# EAGLE board MovuinoHealthBandV0.2.7.4-carrierUSB-v0.2 (EAGLE 9.6.2)
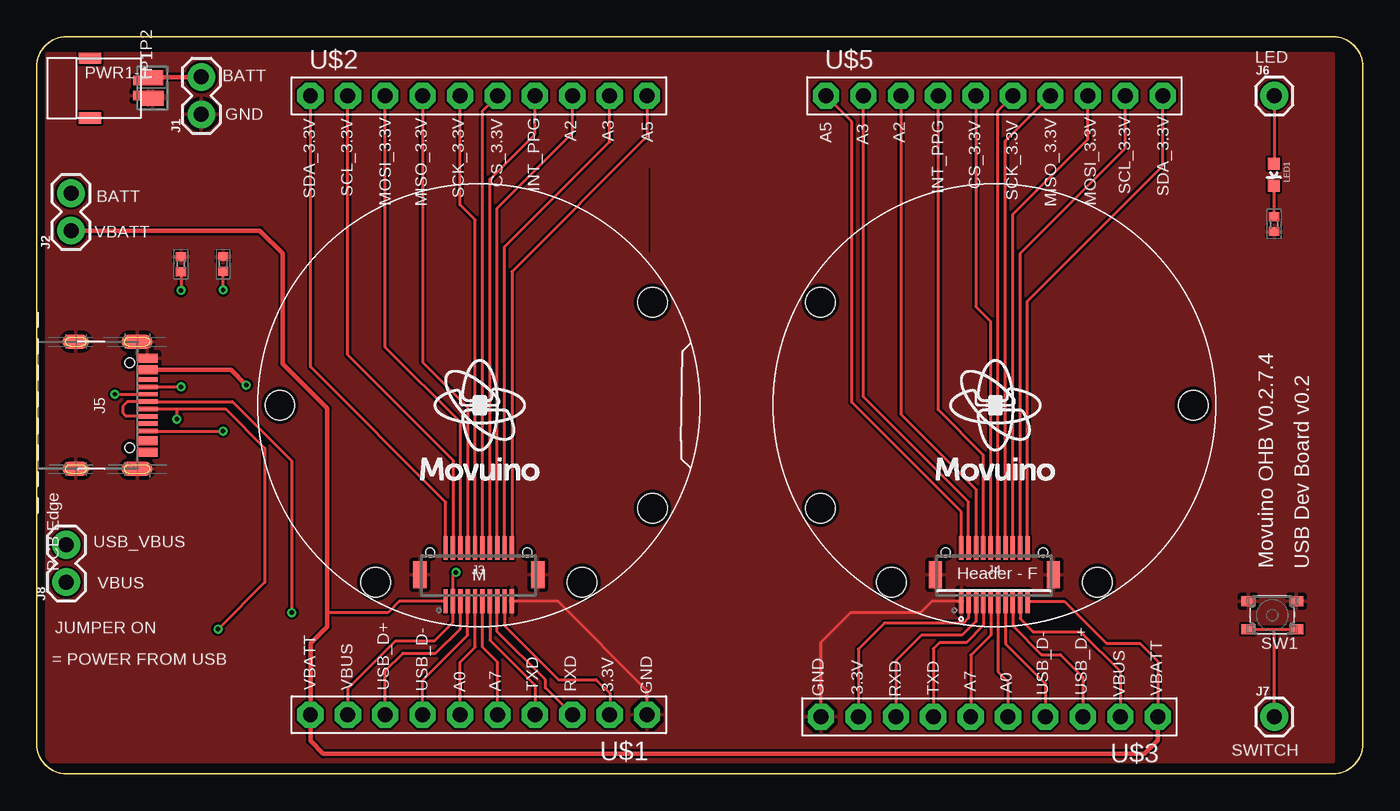
[diagram p0: board, top side]
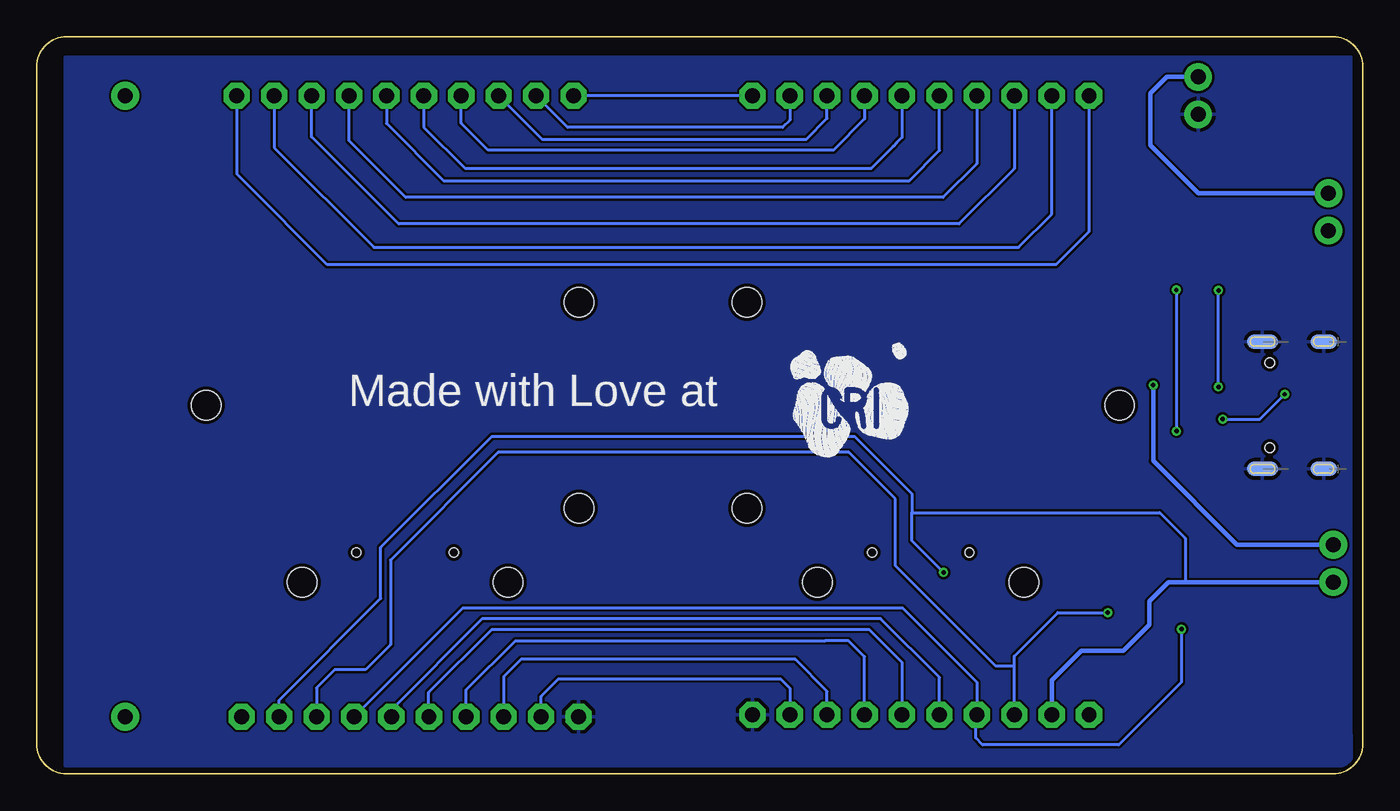
[diagram p1: board, bottom side, seen from below]

Size 90 x 50 mm. Coordinates in mm from the lower left corner, seen from the top.
Outline: 90,2 90,48 arc90 88,50 2,50 arc90 0,48 0,2 arc90 2,0 88,0 arc90 90,2
Copper layers (1*16): Top 0.035mm / dielectric 1.5mm / Bottom 0.035mm
Design rules "PCBWAY_2layer_DRU_no_angle_cheap": minimum track width 6mil, minimum drill 0.3mm, track to track 6mil, track to pad 6mil, pad to pad 6mil, via to via 6mil, smd to smd 0mil, copper to edge 10mil, drill to drill 10mil, minimum pad ring 10mil, minimum via ring 6mil, stop-mask expansion 2mil, vias tented up to drill 100mil, thermal gap 10mil
Net classes: 1 pcbway_smallest: width 0.102 mm, drill 0.2 mm, clearance 0.102 mm; 2 pcbway_cheap: width 0.152 mm, drill 0.3 mm, clearance 0.152 mm; 3 pcbway_5mil: width 0.127 mm, drill 0.25 mm, clearance 0.127 mm; 4 pcbway_4mil: width 0.102 mm, drill 0.2 mm, clearance 0.102 mm; 5 EC-Class7-drill0.15: width 0.125 mm, drill 0.15 mm, clearance 0.125 mm; 6 JLCPCB: width 0.127 mm, drill 0.2 mm, clearance 0.127 mm; 7 JLCPCB_0.3/0.6: width 0.127 mm, drill 0.3 mm, clearance 0.127 mm
Holes 2 mm at 16.5,25 41.8,32 41.8,18 23,13 37,13 58,13 72,13 53.2,18 53.2,32 78.5,25
tRestrict: area 41.6,35.4 to 41.6,41.1

## Footprints (pad centres in the part's own frame; a part is rotated, then mirrored left to right if it is on the bottom)
1X02 = drill 1.016 pad 1.88: 1 0,0; 2 2.54,0
DF12-20-DS = smd 0.3 x 1.6: 1 -2.25,-1.8; 2 -2.25,1.8; 3 -1.75,-1.8; 4 -1.75,1.8; 5 -1.25,-1.8; 6 -1.25,1.8; 7 -0.75,-1.8; 8 -0.75,1.8; 9 -0.25,-1.8; 10 -0.25,1.8; 11 0.25,-1.8; 12 0.25,1.8; 13 0.75,-1.8; 14 0.75,1.8; 15 1.25,-1.8; 16 1.25,1.8; 17 1.75,-1.8; 18 1.75,1.8; 19 2.25,-1.8; 20 2.25,1.8 | smd 0.9 x 1.8: F1 -4,0; F2 4,0 | hole 0.6: -3.3,1.5; 3.3,1.5
DF12(5.0)-20-DP = smd 0.3 x 1.6: 1 -2.25,-1.8; 2 -2.25,1.8; 3 -1.75,-1.8; 4 -1.75,1.8; 5 -1.25,-1.8; 6 -1.25,1.8; 7 -0.75,-1.8; 8 -0.75,1.8; 9 -0.25,-1.8; 10 -0.25,1.8; 11 0.25,-1.8; 12 0.25,1.8; 13 0.75,-1.8; 14 0.75,1.8; 15 1.25,-1.8; 16 1.25,1.8; 17 1.75,-1.8; 18 1.75,1.8; 19 2.25,-1.8; 20 2.25,1.8 | smd 0.9 x 1.8: F1 -4,0; F2 4,0 | hole 0.6: -3.3,1.5; 3.3,1.5
USB-C-16P = smd 0.6 x 1.4: A1B12 -3.2,0.7; A4B9 -2.4,0.7; B1A12 3.2,0.7; B4A9 2.4,0.7 | smd 0.3 x 1.4: A5 -1.25,0.7; A6 -0.25,0.7; A7 0.25,0.7; A8 -1.75,0.7; B5 1.75,0.7; B6 0.75,0.7; B7 -0.75,0.7; B8 1.25,0.7 | smd 1 x 2.1: SHLD1 -4.32,0; SHLD2 4.32,0 | smd 1 x 2.1 bottom: SHLD3 -4.32,0; SHLD4 4.32,0 | smd 1 x 1.8: SHLD5 -4.32,-4.15; SHLD8 4.32,-4.15 | smd 1 x 1.8 bottom: SHLD6 -4.32,-4.15; SHLD7 4.32,-4.15 | hole 0.65: -2.89,-0.5; 2.89,-0.5
1X01 = drill 1.016 pad 1.88: 1 0,0
LED-0603 = smd 0.8 x 0.8: A 0,-0.75; C 0,0.75
PWR2P_1.0 = smd 2.032 x 0.635: + 0.508,0.508; - 0.508,-0.508 | smd 1.524 x 0.762: P$3 -3.429,2.032; P$4 -3.429,-2.032
R0402-SMALL-TDOCU = smd 0.6 x 0.7: 1 -0.5,0; 2 0.5,0
BTN_KMT0 = smd 0.95 x 0.7: A -1.625,0.95; A' 1.625,0.95; B -1.625,-0.95; B' 1.625,-0.95
PAD-1X1.5_NOSILK = smd 1 x 1.5: P$1 0,0
1X10-BIG = drill 1.016 pad 1.778 octagon: 1 -11.43,0; 2 -8.89,0; 3 -6.35,0; 4 -3.81,0; 5 -1.27,0; 6 1.27,0; 7 3.81,0; 8 6.35,0; 9 8.89,0; 10 11.43,0

## Placement (x,y rotation side)
J1  [1X02]  11.17,44.74 90 top
J2  [1X02]  2.32,36.85 90 top
J3  DF12-20-MFRECEPTACLE-MF  [DF12-20-DS]  30,13.5 0 top
J4  DF12-20-MFHEADER-5MM-LEGS-BOSS  [DF12(5.0)-20-DP]  65,13.5 0 top
J5  [USB-C-16P]  6.8,25 270 top
J6  [1X01]  84,46 0 top
J7  [1X01]  84,3.86 0 top
J8  [1X02]  2,13 90 top
LED1  [LED-0603]  83.97,40.64 180 top
PWR1-1  PWR2P_1.0  [PWR2P_1.0]  7.04,46.52 0 top
R2_1  120  [R0402-SMALL-TDOCU]  83.99,37.29 90 top
R2_3  5.1K  [R0402-SMALL-TDOCU]  12.65,34.59 270 top
R2_4  5.1K  [R0402-SMALL-TDOCU]  9.79,34.57 270 top
SW1  [BTN_KMT0]  83.86,10.75 180 top
TP1  [PAD-1X1.5_NOSILK]  7.86,45.81 90 top
TP2  [PAD-1X1.5_NOSILK]  7.84,47.25 90 top
U$1  PINHD-1X10  [1X10-BIG]  30,4 180 top
U$2  PINHD-1X10  [1X10-BIG]  30,46 0 top
U$3  PINHD-1X10  [1X10-BIG]  64.66,3.86 180 top
U$5  PINHD-1X10  [1X10-BIG]  65,46 0 top
U$7  LOGO_MOVUINOTOP  [LOGO_MOVUINO_BMP_10MM]  30,25 0 top
U$8  LOGO_MOVUINOTOP  [LOGO_MOVUINO_BMP_10MM]  65,25 0 top
U$9  LOGO-CRI-NEW-110MM-BOTTOM-SILK  [LOGO_CRI-NEW-BMP10MM-BOTTOM]  34.65,25 0 top

## Library data of the parts
J1 J2 J6-J8 = SparkFun-Connectors
J3 = movuino; DESCRIPTION: Receptacle metal fitting and Boss 3.5 mm - 5mm; MPN: DF12-20DS-0.5V(86)
J4 = movuino; MPN: DF12(5.0)-20DP-0.5V(86)
J5 SW1 TP1 TP2 = movuino
LED1 = movuino; COLOUR: Red; FORWARD_INTENSITY: 25ma; FORWARD_VOLTAGE: 2.5V; LUMINOUS_INTENSITY: 180mcd; MF: OSRAM Opto Semiconductors; MPN: LS Q976-NR-1; OC_MOUSER: 720-LSQ976-NR-1; OC_RS: 6545420
PWR1-1 = movuino; MF: JST; MPN: SM02B-SRSS-TB(LFSN); OC_RS: 5151490
R2_1 R2_3 R2_4 = movuinoV0
U$1-U$3 U$5 = adafruit
U$7-U$9 = movuino_aestheticsV0

## Nets
3.3V [pcbway_cheap]: J3.17 J4.3 U$1.2 U$3.9
A0 [pcbway_cheap]: J3.9 J4.11 U$1.6 U$3.5
A2 [pcbway_cheap]: J3.16 J4.6 U$2.8 U$5.3
A3 [pcbway_cheap]: J3.18 J4.4 U$2.9 U$5.2
A5 [pcbway_cheap]: J3.20 J4.2 U$2.10 U$5.1
A7 [pcbway_cheap]: J3.11 J4.9 U$1.5 U$3.6
BATT [pcbway_cheap]: J1.2 J2.2 PWR1-1.+ TP2.P$1
CS_3.3V [pcbway_cheap]: J3.12 J4.10 U$2.6 U$5.5
GND [pcbway_cheap]: J1.1 J3.19 J3.F1 J3.F2 J4.1 J4.F1 J4.F2 J5.A1B12 J5.SHLD1 J5.SHLD2 J5.SHLD3 J5.SHLD4 J5.SHLD5 J5.SHLD6 J5.SHLD7 J5.SHLD8 PWR1-1.- R2_1.1 R2_3.1 R2_4.1 SW1.B SW1.B' TP1.P$1 U$1.1 U$3.10
INT_PPG [pcbway_cheap]: J3.14 J4.8 U$2.7 U$5.4
MISO_3.3V [pcbway_cheap]: J3.8 J4.14 U$2.4 U$5.7
MOSI_3.3V [pcbway_cheap]: J3.6 J4.16 U$2.3 U$5.8
N$2 [pcbway_cheap]: LED1.C R2_1.2
N$4 [pcbway_cheap]: J6.1 LED1.A
N$6 [pcbway_cheap]: J7.1 SW1.A SW1.A'
N$19 [pcbway_cheap]: J5.A5 R2_4.2
N$20 [pcbway_cheap]: J5.B5 R2_3.2
RXD [pcbway_cheap]: J3.15 J4.5 U$1.3 U$3.8
SCK_3.3V [pcbway_cheap]: J3.10 J4.12 U$2.5 U$5.6
SCL_3.3V [pcbway_cheap]: J3.4 J4.18 U$2.2 U$5.9
SDA_3.3V [pcbway_cheap]: J3.2 J4.20 U$2.1 U$5.10
TXD [pcbway_cheap]: J3.13 J4.7 U$1.4 U$3.7
USB_D+ [pcbway_cheap]: J3.5 J4.15 J5.A6 J5.B6 U$1.8 U$3.3
USB_D- [pcbway_cheap]: J3.7 J4.13 J5.A7 J5.B7 U$1.7 U$3.4
USB_VBUS [pcbway_cheap]: J5.A4B9 J8.2
VBATT [pcbway_cheap]: J2.1 J3.1 J4.19 U$1.10 U$3.1
VBUS [pcbway_cheap]: J3.3 J4.17 J8.1 U$1.9 U$3.2

## Tracks (layer width: path | path; a pad name or v marks a point on that pad's centre or on a via)
3.3V
  Top 0.2: J3.17 31.75,10.04 35.41,6.38 37.97,6.38 38.9,5.45 U$1.2 | J4.3 63.25,10.57 62.9,10.22 57.53,10.22 55.77,8.46 U$3.9
  Bottom 0.2: U$3.9 55.77,5.25 54.59,6.43 39.51,6.43 38.89,5.81 U$1.2
A0
  Top 0.2: U$1.6 28.73,7.56 29.75,8.58 J3.9 | J4.11 65.25,6.93 65.93,6.25 U$3.5
  Bottom 0.2: U$3.5 65.93,4.35 59.76,10.52 32.72,10.52 28.73,6.53 U$1.6
A2
  Top 0.2: J3.16 31.25,38.38 36.35,43.48 U$2.8 | U$5.3 58.65,24.4 63.75,19.3 J4.6
  Bottom 0.2: U$5.3 55.7,43.05 37.76,43.05 36.35,44.46 U$2.8
A3
  Top 0.2: J3.18 31.75,35.74 38.89,42.88 U$2.9 | J4.4 63.25,18.44 56.11,25.58 U$5.2
  Bottom 0.2: U$2.9 38.89,44.35 39.38,43.86 53.97,43.86 U$5.2
A5
  Top 0.2: U$2.10 41.43,43.25 32.25,34.07 J3.20 | U$5.1 55.32,44.25 55.32,25.2 62.75,17.77 J4.2
  Bottom 0.2: U$2.10 U$5.1
A7
  Top 0.2: U$1.5 31.27,7.57 30.25,8.59 J3.11 | J4.9 64.75,9.41 63.39,8.05 U$3.6
  Bottom 0.2: U$3.6 63.39,5.51 59.11,9.79 33.51,9.79 31.27,7.55 U$1.5
BATT
  Top 0.305: J1.2 11.14,47.25 TP2.P$1 7.62,47.03 PWR1-1.+
  Bottom 0.305: J2.2 11.16,39.39 14.4,42.63 14.4,46.16 13.28,47.28 J1.2
CS_3.3V
  Top 0.2: J3.12 30.25,44.98 U$2.6 | J4.10 64.75,30.67 63.73,31.69 U$5.5
  Bottom 0.2: U$5.5 63.73,43.88 60.94,41.09 33.36,41.09 31.86,42.59 31.6,42.85 31.27,43.18 U$2.6
GND
  Top 0.2: U$1.1 41.43,5.64 35.37,11.7 J3.19 | U$3.10 53.23,8.92 55.23,10.92 59.97,10.92 60.75,11.7 J4.1
  pour Top: 0.67,2.78 0.67,48.88 88,48.88 88,0.79 86.67,0.79 0.66,0.79 0.66,2.93
  pour Bottom: 0.76,2.52 0.76,48.62 88.09,48.62 88.09,0.53 0.75,0.53 0.75,2.67
INT_PPG
  Top 0.2: J3.14 30.75,40.34 33.81,43.4 U$2.7 | J4.8 64.25,21.62 61.19,24.68 U$5.4
  Bottom 0.2: U$2.7 33.81,44.43 35.92,42.32 59.36,42.32 61.19,44.15 U$5.4
MISO_3.3V
  Top 0.2: U$2.4 26.19,27.93 29.25,24.87 J3.8 | J4.14 65.75,42.94 U$5.7
  Bottom 0.2: U$2.4 26.19,41.4 28.48,39.11 64.96,39.11 68.81,42.96 U$5.7
MOSI_3.3V
  Top 0.2: J3.6 28.75,23.85 23.65,28.95 U$2.3 | J4.16 66.25,37.96 71.35,43.06 U$5.8
  Bottom 0.2: U$2.3 23.65,41.06 27.4,37.31 65.44,37.31 71.35,43.22 U$5.8
N$2
  Top 0.2: LED1.C 83.97,37.81 R2_1.2
N$4
  Top 0.2: J6.1 84,41.42 LED1.A
N$6
  Top 0.2: SW1.A' 84.01,9.8 | 84.01,9.8 SW1.A | J7.1 84.01,9.8
N$19  (via drill 0.3 pad 0.6)
  Top 0.2: J5.A5 v9.79,26.25 | R2_4.2 v9.79,32.8
  Bottom 0.2: v9.79,26.25 v9.79,32.8
N$20  (via drill 0.3 pad 0.6)
  Top 0.2: v12.65,32.83 R2_3.2 | J5.B5 v12.64,23.25
  Bottom 0.2: v12.65,32.83 v12.65,23.26 v12.64,23.25
RXD
  Top 0.2: J3.15 31.25,9.63 34.52,6.36 34.52,5.83 U$1.3 | J4.5 63.75,10.34 62.81,9.4 60.05,9.4 58.31,7.66 U$3.8
  Bottom 0.2: U$1.3 36.35,5.59 38.51,7.75 57.14,7.75 58.31,6.58 U$3.8
SCK_3.3V
  Top 0.2: J3.10 29.75,37.58 28.73,38.6 U$2.5 | J4.12 65.25,44.98 U$5.6
  Bottom 0.2: U$5.6 66.27,44.13 62.39,40.25 30.78,40.25 28.73,42.3 U$2.5
SCL_3.3V
  Top 0.2: J3.4 28.25,21.28 21.09,28.44 21.09,45.98 U$2.2 | J4.18 66.75,35.3 73.89,42.44 U$5.9
  Bottom 0.2: U$5.9 73.89,42.48 67.12,35.71 23.37,35.71 21.11,37.97 U$2.2
SDA_3.3V
  Top 0.2: J3.2 27.75,18.42 18.57,27.6 U$2.1 | J4.20 67.25,32.06 76.43,41.24 U$5.10
  Bottom 0.2: U$2.1 18.57,36.79 20.81,34.55 70.28,34.55 75.94,40.21 76.09,40.36 76.43,40.7 U$5.10
TXD
  Top 0.2: J3.13 30.75,9.07 33.81,6.01 U$1.4 | J4.7 64.25,10.06 63.09,8.9 61.27,8.9 60.85,8.48 U$3.7
  Bottom 0.2: U$3.7 60.85,5.68 57.51,9.02 36.71,9.02 36.49,9.02 34.89,9.02 33.81,7.94 U$1.4
USB_D+  (via drill 0.3)
  Top 0.2: U$1.8 23.65,6.98 24.85,8.18 27.08,8.18 28.75,9.85 J3.5 | J4.15 66.25,10.03 68.2,8.08 69.49,8.08 71.01,6.56 U$3.3 | v17.31,10.93 17.31,21.23 13.29,25.25 J5.A6 6.15,25.25 5.83,24.93 5.83,24.48 6,24.32 6.06,24.25 J5.B6
  Bottom 0.2: U$1.8 23.65,7.3 | U$3.3 71.01,5.82 69.77,7.06 67.69,7.06 66,8.75 66,14.49 58.69,21.8 34.88,21.8 31.72,18.64 31.72,14.12 24.9,7.3 23.65,7.3 | 23.65,7.3 23.65,7.98 20.7,10.93 v17.31,10.93
USB_D-  (via drill 0.3, 0.3 pad 0.6)
  Top 0.2: U$1.7 26.19,6.34 29.25,9.4 J3.7 | U$3.4 68.47,6.11 65.75,8.83 J4.13 | J5.A7 9.53,24.75 | 9.53,24.75 12.82,24.75 15.48,22.09 15.48,12.99 v12.3,9.81 | 9.53,24.75 9.5,24.72 v9.5,24.06 | v5.3,25.75 J5.B7
  Bottom 0.2: U$3.4 61.08,11.25 31.23,11.25 26.19,6.21 26.19,4.33 | 26.19,4.33 U$1.7 | 26.19,4.33 26.27,4.25 26.27,2.43 25.8,1.96 16.56,1.96 12.3,6.22 v12.3,9.81 | v9.5,24.06 6.99,24.06 v5.3,25.75
USB_VBUS  (via drill 0.3 pad 0.6)
  Top 0.305: J5.A4B9 13.19,27.4 v14.22,26.37
  Bottom 0.305: v14.22,26.37 14.22,21.22 8.54,15.54 J8.2
VBATT
  Top 0.2: U$3.1 76.09,7.63 74.88,8.84 72.61,8.84 69.75,11.7 J4.19 | J3.1 24.6,11.7 23.83,10.93 19.71,10.93
  Top 0.305: U$3.1 76.09,2.27 75.17,1.35 19.44,1.35 18.57,2.22 U$1.10 18.57,8.84 19.71,9.98 19.71,10.93 19.71,24.79 16.68,27.82 16.68,35.31 15.14,36.85 J2.1
VBUS  (via drill 0.3)
  Top 0.2: J4.17 66.75,10.52 67.63,9.64 70.85,9.64 73.55,6.94 U$3.2 | v28.45,13.66 28.25,13.46 J3.3 28.25,10.26 27,9.01 24.36,9.01 21.11,5.76 U$1.9
  Bottom 0.2: U$3.2 73.55,4.99 66.65,11.89 66.65,15.35 59.11,22.89 34.49,22.89 30.61,19.01 30.61,17.71 | 30.61,17.71 30.61,15.82 v28.45,13.66 | 30.61,17.71 13.78,17.71 12.04,15.97 12.04,13.07 12.11,13
  Bottom 0.305: U$1.9 21.11,6.33 19.1,8.34 16.26,8.34 14.49,10.11 14.49,11.69 13.18,13 12.11,13 J8.1

## Text on the board
tPlace: LED | BATT | GND | A2 | A3 | A5 | A5 | A3 | A2 | BATT | CS_3.3V | INT_PPG | CS_3.3V | SDA_3.3V | SCL_3.3V | MOSI_3.3V | SCK_3.3V | INT_PPG | SCK_3.3V | MOSI_3.3V | SCL_3.3V | SDA_3.3V | MISO_3.3V | MISO_3.3V | VBATT | Movuino OHB V0.2.7.4 | USB Dev Board v0.2 | USB_VBUS | VBUS | M | Header - F | JUMPER ON | = POWER FROM USB | VBATT | VBUS | USB_D+ | USB_D- | A0 | A7 | TXD | RXD | 3.3V | A7 | GND | GND | 3.3V | RXD | TXD | A0 | USB_D- | USB_D+ | VBUS | VBATT | SWITCH
bPlace: Made with Love at